# Altium PCB 远程医疗.PcbDoc
Units mm, origin at the board's own origin, x right, y up, seen from the top; angles counter-clockwise.
Board outline 50 x 100 mm, 4 copper layers (Top Layer, Internal Plane 1, Internal Plane 2, Bottom Layer); 81 components, 85 nets, 357 pads, 0 vias.
Unrouted connection lines stored in the file: 236.
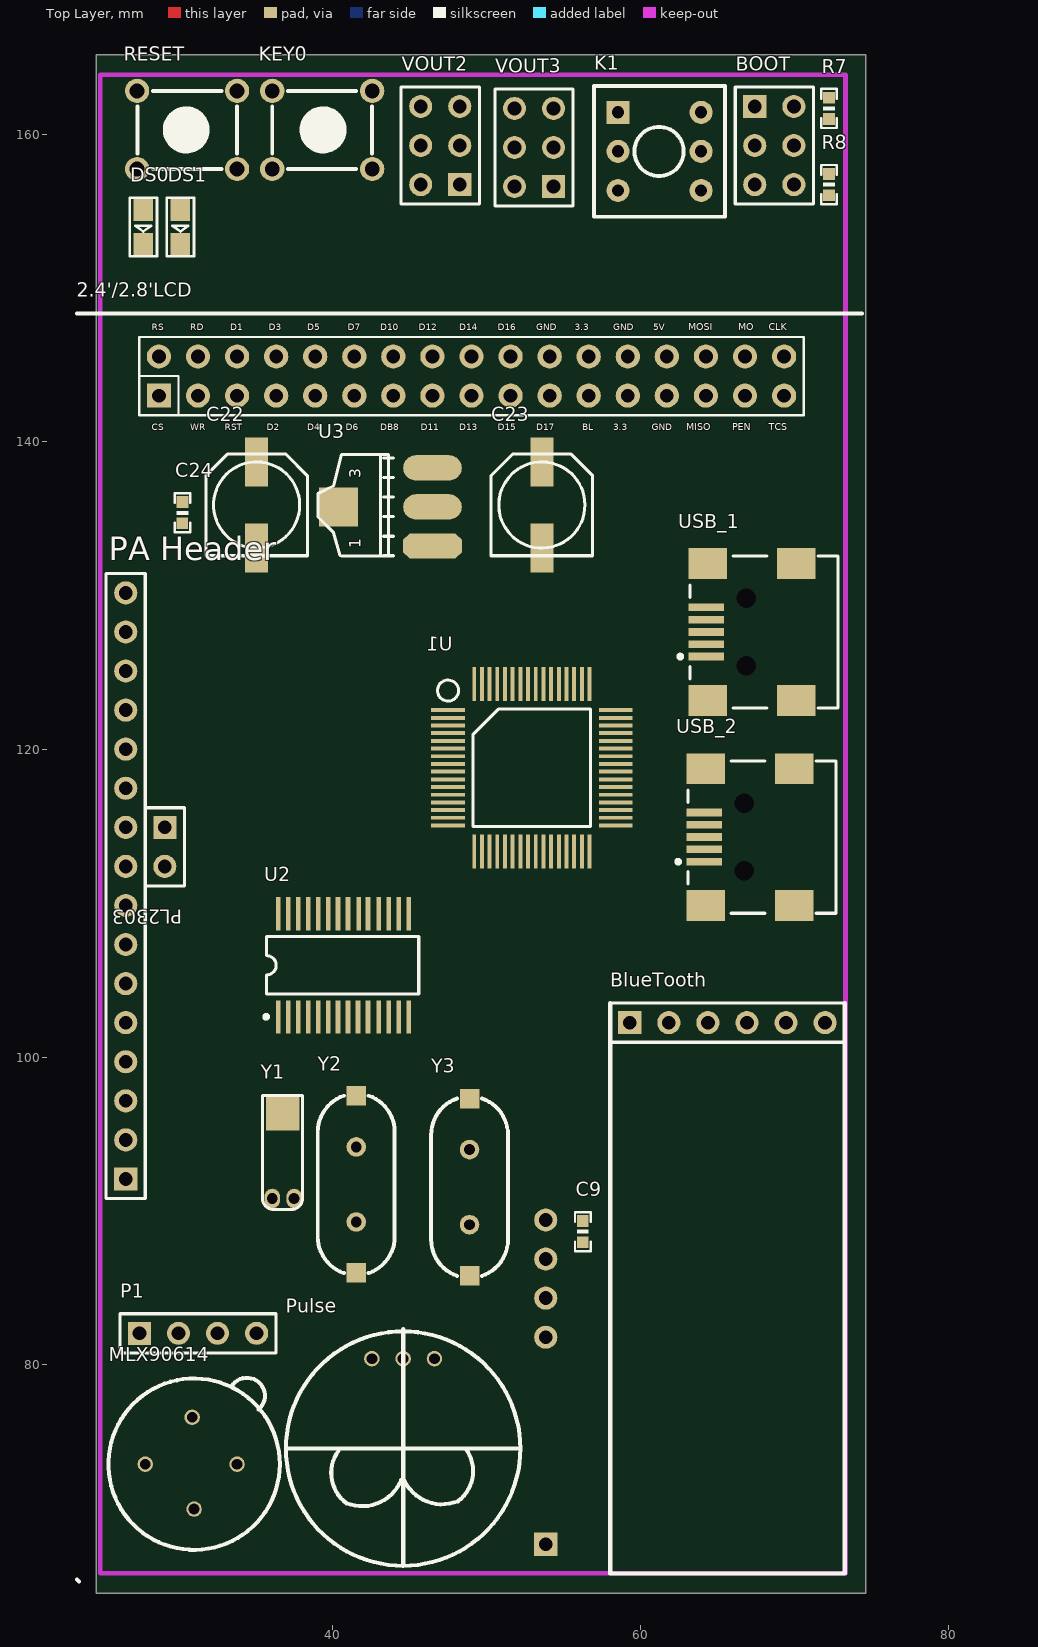
[diagram p0: Top Layer view]
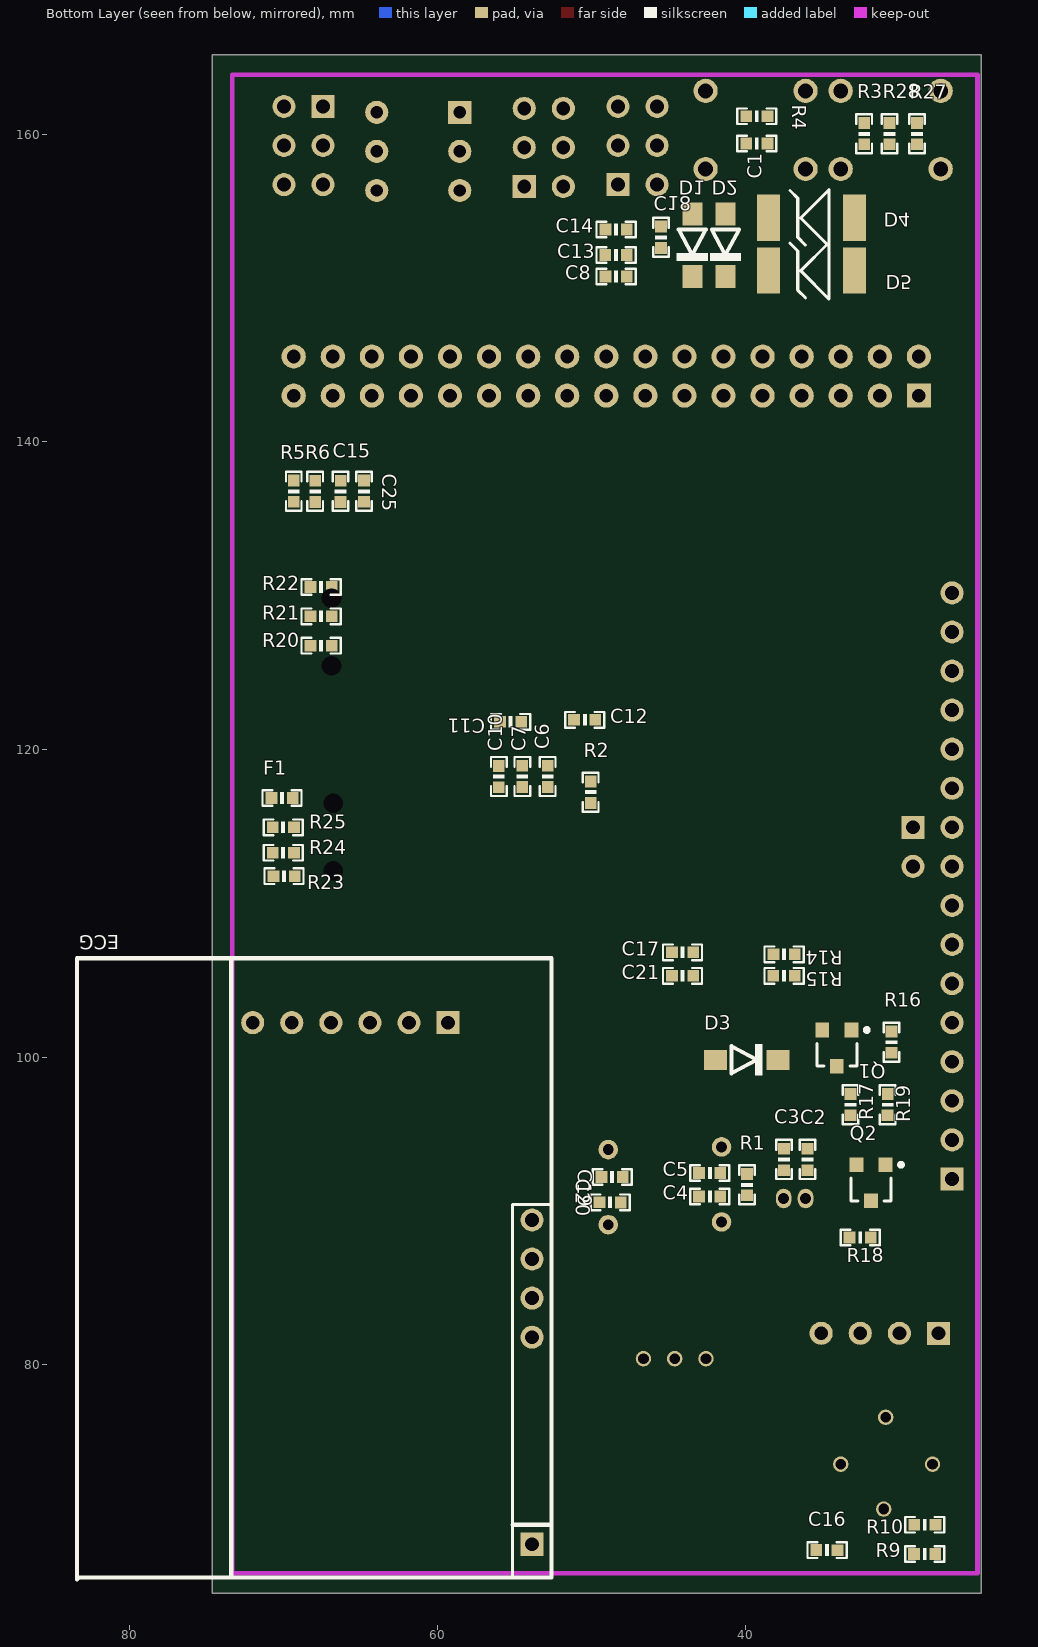
[diagram p1: Bottom Layer view, seen from below]
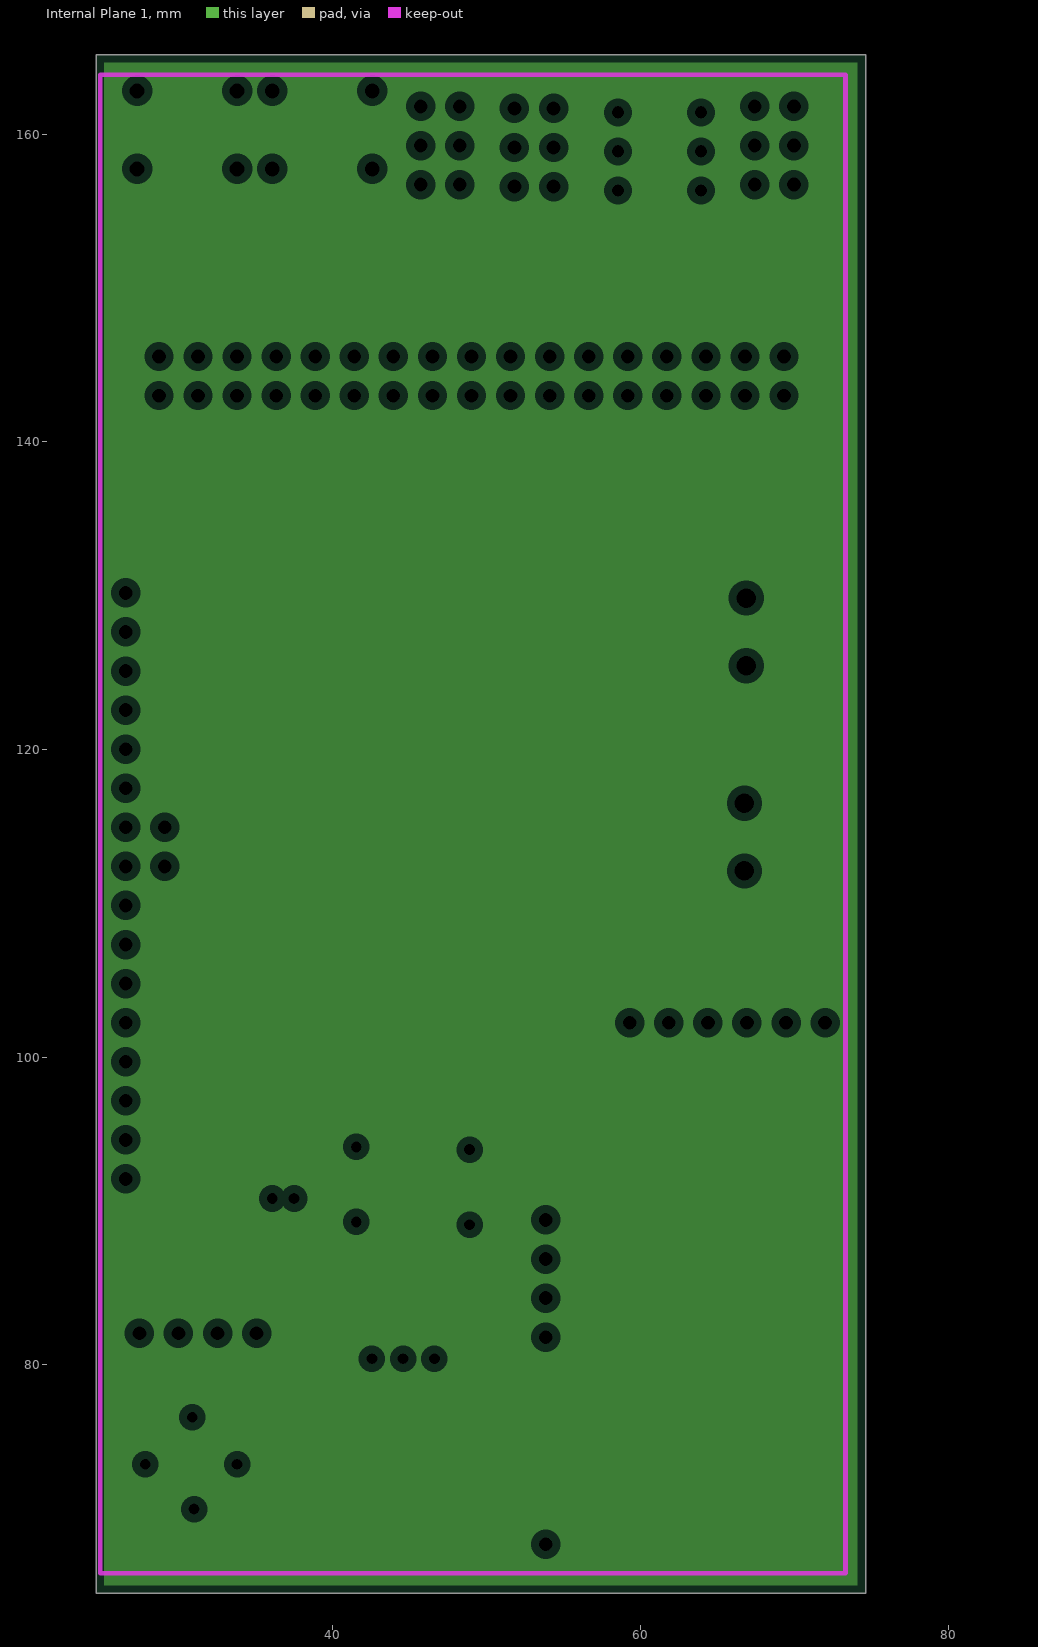
[diagram p2: Internal Plane 1, clearances drawn from the general rule]
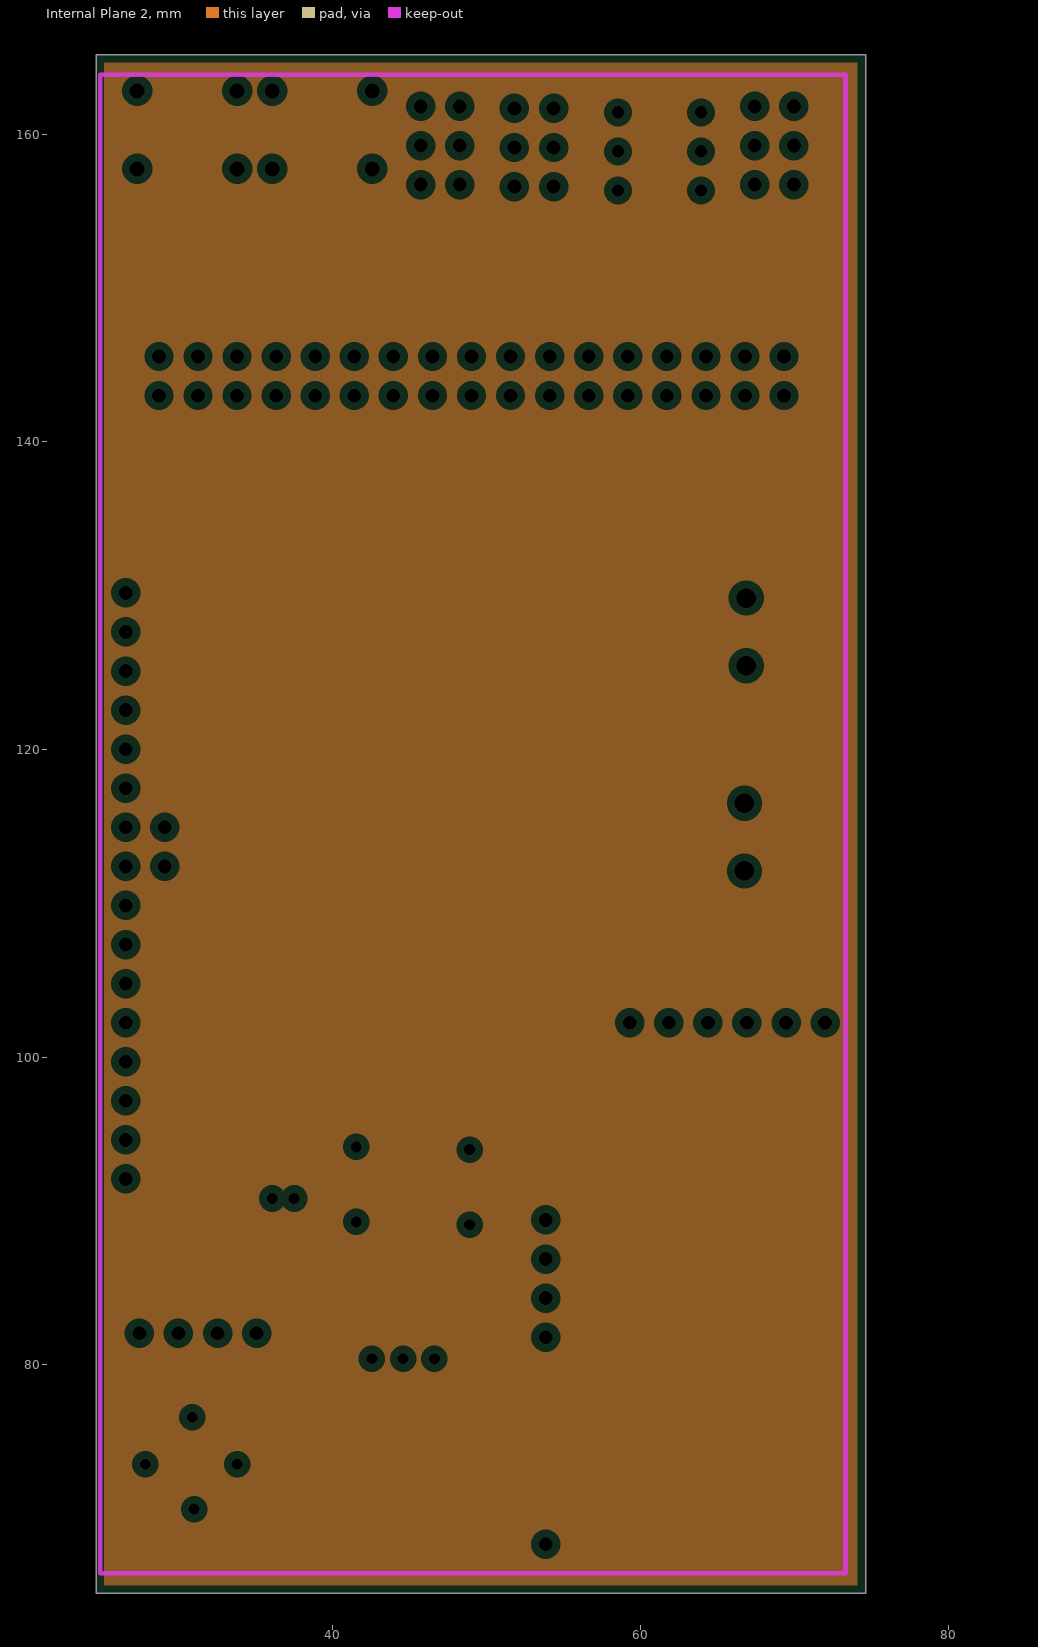
[diagram p3: Internal Plane 2, clearances drawn from the general rule]

## Layer stack, top to bottom
Top Layer: signal copper 0.0356
Dielectric: dielectric 0.32, FR-4, Dk 4.8
Internal Plane 1: plane copper 0.0356
Dielectric: dielectric 0.32, FR-4, Dk 4.8
Internal Plane 2: plane copper 0.0356
Dielectric: dielectric 0.32, FR-4, Dk 4.8
Bottom Layer: signal copper 0.0356

## Board outline
24.638,65.151 74.638,65.151 74.638,165.151 24.638,165.151

## Design rules (kind name [scope] priority, off if disabled: settings)
Clearance [All] p1: gap=0.3
PlaneClearance [All] p1: clearance=0.508
PlaneConnect [All] p1: planeconnectstyle=Relief reliefexpansion=0.508 reliefentries=4 reliefconductorwidth=0.254 reliefairgap=0.254
PolygonConnect [All] p1: connectstyle=Relief reliefconductorwidth=0.254 reliefentries=4 polygonreliefangle="90 Angle" airgapwidth=0.254
RoomDefinition 远程医疗 [InComponentClass('远程医疗')] p1: confinementstyle=ConfineIn formatcopy=TRUE lockcomponents=FALSE outline 0,0 50.8,0 50.8,25.4 0,25.4
RoutingVias [All] p1: holewidth=0.8 width=1.6 viastyle="Through Hole" minholewidth=0.711 minwidth=1.27 maxholewidth=0.711 maxwidth=1.27
SolderMaskExpansion [All] p1: expansion=0.102
Width [All] p1: maxlimit=0.3 minlimit=0.3 preferedwidth=0.3
26 further rules are at their usual default settings.

## Components (designator, comment, footprint, x,y, rotation, side; value= is the part's Value field where it differs from the comment)
2.4'/2.8'LCD "TFT_LCD" DB2*17 54.102,117.602 r0 top
BlueTooth "BlueTooth" BlueTooth 59.309,102.235 r0 top
BOOT "VCC5" HDR2X3 67.437,161.798 r270 top
C1 "104" 0603P#1 39.243,159.385 r180 bottom
C2 "22pF" 0603P#1 35.941,93.345 r270 bottom
C3 "22pF" 0603P#1 37.465,93.345 r270 bottom
C4 "22pF" 0603P#1 42.291,90.932 r0 bottom
C5 "22pF" 0603P#1 42.291,92.456 r0 bottom
C6 "104" 0603P#1 52.832,118.237 r90 bottom
C7 "10u" 0603P#1 54.483,118.237 r90 bottom
C8 "104" 0603P#1 48.387,150.749 r180 bottom
C9 "104" 0603P#1 56.261,88.646 r90 top
C10 "104" 0603P#1 56.007,118.237 r270 bottom
C11 "104" 0603P#1 55.245,121.793 r180 bottom
C12 "104" 0603P#1 50.419,121.92 r0 bottom
C13 "104" 0603P#1 48.387,152.146 r0 bottom
C14 "104" 0603P#1 48.387,153.797 r180 bottom
C15 "22pF" 0603P#1 66.294,136.779 r270 bottom
C16 "100nF" 0603P#1 34.671,67.945 r0 bottom
C17 "104" 0603P#1 44.069,106.807 r180 bottom
C18 "104" 0603P#2 45.466,153.289 r90 bottom
C19 "22" 0603P#1 48.641,92.202 r0 bottom
C20 "22" 0603P#1 48.768,90.551 r0 bottom
C21 "10u" 0603P#1 44.069,105.283 r180 bottom
C22 "220uF" CC6.56.5 35.052,135.89 r270 top
C23 "220uF" CC6.56.5 53.594,135.89 r270 top
C24 "104" 0603P#1 30.226,135.382 r90 top
C25 "104" 0603P#1 64.77,136.779 r90 bottom
D1 "1N4148" DIODE_SOP 43.434,152.781 r270 bottom
D2 "1N4148" DIODE_SOP 41.275,152.781 r270 bottom
D3 "1N4148" DIODE_SOP 39.878,99.822 r180 bottom
D4 "SMBJ5.0A" SMBJ 35.56,154.559 r0 bottom
D5 "SMBJ3.3A" SMBJ 35.56,151.13 r0 bottom
DS0 "LED0" SMDLED 27.688,155.068 r270 top
DS1 "PWR" SMDLED 30.101,155.068 r270 top
ECG "ECG" ECG 53.848,68.326 r90 bottom
F1 "500mA" 0603P#1 70.104,116.84 r180 bottom
K1 "BUTTON" BTN8.5*8.5 58.547,161.417 r0 top
KEY0 "KEY_M" KEY_M 36.068,162.814 r0 top
MLX90614 "MLX90614" MLX90614 30.861,76.581 r90 top
P1 "Header 4" HDR1X4 27.432,82.042 r0 top
"PA Header" "Header 16" HDR1X16 26.543,92.075 r90 top
PL2303 "UART" HDR1X2 29.083,114.935 r270 top
Pulse "Pulse" Pulse 46.609,80.391 r180 top
Q1 "8050" SOT-23R 34.036,100.711 r0 bottom
Q2 "8550" SOT-23R 31.813,91.948 r0 bottom
R1 "1M" 0603P#1 39.878,91.694 r90 bottom
R2 "10R" 0603P#1 50.038,117.221 r270 bottom
R3 "10K" 0603P#1 32.258,160.02 r90 bottom
R4 "0R" 0603P#1 39.243,161.163 r180 bottom
R5 "4.7K" 0603P#1 69.342,136.779 r90 bottom
R6 "10R" 0603P#1 67.945,136.779 r270 bottom
R7 "100K" 0603P#1 72.263,161.671 r90 top
R8 "100K" 0603P#1 72.263,156.718 r270 top
R9 "4.7K" 0603P#1 28.321,67.691 r0 bottom
R10 "4.7K" 0603P#1 28.321,69.596 r180 bottom
R14 "10K" 0603P#1 37.465,106.68 r180 bottom
R15 "10K" 0603P#1 37.465,105.283 r0 bottom
R16 "1K" 0603P#1 30.48,100.965 r90 bottom
R17 "10K" 0603P#1 33.147,96.901 r90 bottom
R18 "1K" 0603P#1 32.512,88.265 r0 bottom
R19 "1K" 0603P#1 30.734,96.901 r90 bottom
R20 "22R" 0603P#1 67.564,126.746 r180 bottom
R21 "22R" 0603P#1 67.564,128.651 r180 bottom
R22 "1.5K" 0603P#1 67.564,130.556 r180 bottom
R23 "22R" 0603P#1 69.977,111.76 r180 bottom
R24 "22R" 0603P#1 70.028,113.284 r180 bottom
R25 "1.5K" 0603P#1 70.028,114.935 r180 bottom
R27 "510" 0603P#1 28.829,160.02 r90 bottom
R28 "510" 0603P#1 30.607,160.02 r90 bottom
RESET "KEY_M" KEY_M 33.782,157.734 r180 top
U1 "STM32F103RCT6" LQFP64 47.498,122.555 r0 top
U2 "PL2303" ssop28 36.449,102.616 r90 top
U3 "AMS1117-3.3" AMS1117 46.482,133.223 r90 top
USB_1 "USB" USB/SM0.8-6H5 72.136,127.635 r0 top
USB_2 "USB" USB/SM0.8-6H5 72.009,114.3 r0 top
VOUT2 "VCC3.3" HDR2X3 48.26,156.718 r90 top
VOUT3 "VCC5" HDR2X3 54.356,156.591 r90 top
Y1 "32.768MHz" "XTAL 32M" 36.068,90.805 r90 top
Y2 "8MHz" XTAL_US 41.529,89.281 r90 top
Y3 "12MHz" XTAL_US 48.895,93.98 r270 top

## Footprints (in the part's own frame and the unit in brackets; to place one, negate y for a bottom-side part, rotate by r counter-clockwise, add the part's x,y. Pads: shape width x height; smd on the part's side, far side on the other; paste and mask are expansions set on the pad)
0603P#1 [mil]
  rect 30x30 smd: 1(-27,0) 2(27.5,-0.06)
  silkscreen extent -50,-20 50,20
0603P#2 [mil]
  rect 30x30 smd: 1(-27,0) 2(27.5,0.06)
  silkscreen extent -50,-20 50,20
AMS1117 [mil]
  oct 65x150 smd: 1(0.03,-0.06)
  oval 65x150 smd: 2(100.03,-0.06) 3(200.03,-0.06)
  rect 100x100 smd: 4(100.03,239.94)
  silkscreen extent -26,100 234,293
BlueTooth [mm]
  rect 1.5x1.5 hole 0.9: 1(0,0)
  round 1.5 hole 0.9: 2(2.54,0) 3(5.08,0) 4(7.62,0) 5(10.16,0) 6(12.7,0)
  silkscreen extent -1.27,-35.81 13.97,1.27
BTN8.5*8.5 [mm]
  rect 1.5x1.5 hole 0.8: 1(0,0)
  round 1.5 hole 0.8: 2(0,-2.54) 3(0,-5.08) 4(5.4,-5.08) 5(5.4,-2.54) 6(5.4,0)
  silkscreen extent -1.55,-6.79 6.95,1.71
CC6.56.5 [mm]
  rect 3.2x1.5 smd: 1(-2.794,0) 2(2.8,0)
  silkscreen extent -3.3,-3.3 3.3,3.3
DB2*17 [mil]
  rect 62x62 hole 35: 1(-1000,1000)
  round 62 hole 35: 2(-1000,1100) 3(-900,1000) 4(-900,1100) 5(-800,1000) 6(-800,1100) 7(-700,1000) 8(-700,1100) 9(-600,1000) 10(-600,1100) 11(-500,1000) 12(-500,1100) 13(-400,1000) 14(-400,1100) 15(-300,1000) 16(-300,1100) 17(-200,1000) 18(-200,1100) 19(-100,1000) 20(-100,1100) 21(0,1000) 22(0,1100) 23(100,1000) 24(100,1100) 25(200,1000) 26(200,1100) 27(300,1000) 28(300,1100) 29(400,1000) 30(400,1100) 31(500,1000) 32(500,1100) 33(600,1000) 34(600,1100)
  round 133.86 on Top Overlay: ""(-1080,-1935) ""(675,-1935)
  silkscreen extent -1210,-2035 800,1210
DIODE_SOP [mm]
  rect 1.5x1.3 smd: 1(-2.032,0) 2(2.032,0)
  silkscreen extent -1.02,-1.02 1.02,1.02
ECG [mm]
  rect 1.5x1.5 hole 0.9: 1(0,0)
  round 1.5 hole 0.9: 2(13.462,0) 3(16.002,0) 4(18.542,0) 5(21.082,0)
  silkscreen extent -2.29,-1.27 38.1,29.59
HDR1X2 [mm] "Connector; Header; 2 Position"
  rect 1.5x1.5 hole 0.9: 1(0,0)
  round 1.5 hole 0.9: 2(2.54,0)
  silkscreen extent -1.27,-1.27 3.81,1.27
HDR1X4 [mm] "Connector; Header; 4 Position"
  rect 1.5x1.5 hole 0.9: 1(0,0)
  round 1.5 hole 0.9: 2(2.54,0) 3(5.08,0) 4(7.62,0)
  silkscreen extent -1.27,-1.27 8.89,1.27
HDR1X16 [mm]
  rect 1.5x1.5 hole 0.9: 1(0,0)
  round 1.5 hole 0.9: 2(2.54,0) 3(5.08,0) 4(7.62,0) 5(10.16,0) 6(12.7,0) 7(15.24,0) 8(17.78,0) 9(20.32,0) 10(22.86,0) 11(25.4,0) 12(27.94,0) 13(30.48,0) 14(33.02,0) 15(35.56,0) 16(38.1,0)
  silkscreen extent -1.27,-1.27 39.37,1.27
HDR2X3 [mm]
  rect 1.5x1.5 hole 0.9: 1(0,0)
  round 1.5 hole 0.9: 2(0,2.54) 3(2.54,0) 4(2.54,2.54) 5(5.08,0) 6(5.08,2.54)
  silkscreen extent -1.27,-1.27 6.35,3.81
KEY_M [mil]
  round 62 hole 38: 1(0,0) 1(255.91,0) 2(0,-200) 2(255.91,-200)
  silkscreen extent 0,-200 255,0
LQFP64 [mm] "LQFP64"
  rect 2.2x0.254 smd: 1(0,0) 2(0,-0.5) 3(0,-1) 4(0,-1.5) 5(0,-2) 6(0,-2.5) 7(0,-3) 8(0,-3.5) 9(0,-4) 10(0,-4.5) 11(0,-5) 12(0,-5.5) 13(0,-6) 14(0,-6.5) 15(0,-7) 16(0,-7.5) 33(10.9,-7.5) 34(10.9,-7) 35(10.9,-6.5) 36(10.9,-6) 37(10.9,-5.5) 38(10.9,-5) 39(10.9,-4.5) 40(10.9,-4) 41(10.9,-3.5) 42(10.9,-3) 43(10.9,-2.5) 44(10.9,-2) 45(10.9,-1.5) 46(10.9,-1) 47(10.9,-0.5) 48(10.9,0)
  rect 0.254x2.2 smd: 17(1.7,-9.2) 18(2.2,-9.2) 19(2.7,-9.2) 20(3.2,-9.2) 21(3.7,-9.2) 22(4.2,-9.2) 23(4.7,-9.2) 24(5.2,-9.2) 25(5.7,-9.2) 26(6.2,-9.2) 27(6.7,-9.2) 28(7.2,-9.2) 29(7.7,-9.2) 30(8.2,-9.2) 31(8.7,-9.2) 32(9.2,-9.2) 49(9.2,1.7) 50(8.7,1.7) 51(8.2,1.7) 52(7.7,1.7) 53(7.2,1.7) 54(6.7,1.7) 55(6.2,1.7) 56(5.7,1.7) 57(5.2,1.7) 58(4.7,1.7) 59(4.2,1.7) 60(3.7,1.7) 61(3.2,1.7) 62(2.7,1.7) 63(2.2,1.7) 64(1.7,1.7)
  silkscreen extent -0.68,-7.56 9.26,1.95
MLX90614 [mm]
  round 1 hole 0.7: 1(0,0) 2(-3.048,3.048) 3(-5.969,-0.127) 4(-3.048,-2.921)
  silkscreen extent -8.62,-5.7 2.56,5.44
Pulse [mm]
  round 1 hole 0.7: 1(0,0) 2(2.032,0) 3(4.064,0)
  silkscreen extent -5.59,-1.9 9.65,13.46
SMBJ [mm]
  rect 1.5x3 smd: 1(-2.667,0) 2(2.921,0)
  silkscreen extent -1.02,-1.83 1.52,1.85
SMDLED [mm]
  rect 1.4x1.27 smd: 1(0.001,-0.002) 2(2.211,-0.002)
  silkscreen extent -0.8,-0.89 3.01,0.89
SOT-23R [mm]
  rect 0.9x0.95 smd: 1(0.95,-1.048) 2(-0.95,-1.048) 3(0,1.302)
  silkscreen extent -2.07,-1.17 1.3,1.3
ssop28 [mm]
  rect 2.15x0.305 smd: 1(0,0) 2(0,-0.65) 3(0,-1.3) 4(0,-1.95) 5(0,-2.6) 6(0,-3.25) 7(0,-3.9) 8(0,-4.55) 9(0,-5.2) 10(0,-5.85) 11(0,-6.552) 12(0,-7.202) 13(0,-7.852) 14(0,-8.502) 15(6.7,-8.502) 16(6.7,-7.852) 17(6.7,-7.202) 18(6.7,-6.552) 19(6.7,-5.85) 20(6.7,-5.252) 21(6.7,-4.55) 22(6.7,-3.9) 23(6.7,-3.25) 24(6.7,-2.6) 25(6.7,-1.95) 26(6.7,-1.3) 27(6.7,-0.65) 28(6.7,0)
  silkscreen extent -0.12,-9.14 5.22,0.9
USB/SM0.8-6H5 [mm]
  rect 2.3x0.5 smd: 1(-7.85,-1.6) 2(-7.85,-0.8) 3(-7.85,0) 4(-7.85,0.8) 5(-7.85,1.6)
  rect 2.5x2 smd: 6(-7.75,4.45) 7(-1.996,4.45) 8(-7.75,-4.45) 9(-1.996,-4.45)
  round 0.6 hole 1.27 unplated: MH1(-5.25,2.2) MH2(-5.25,-2.2)
  silkscreen extent -9.67,-4.95 0.7,4.95
"XTAL 32M" [mil]
  oval 50x40 hole 28: 1(0,0) 2(0,-56)
  rect 92.13x86 smd: ""(220,-27)
  silkscreen extent -28,-77 264,25
XTAL_US [mil]
  round 50 hole 28: 1(0,0) 2(192.13,0)
  rect 50x50 smd: ""(-130.32,0) ""(322.44,0)
  silkscreen extent -131,-98 323,98

## Part data
BOOT VOUT2 VOUT3: library part "Header 3X2", "Header, 3-Pin, Dual row"
C1 C2 C3 C4 C5 C6 C7 C8 C9 C10 C11 C12 C13 C14 C15 C16 C17 C18 C19 C20 C21 C24 C25: library part C
C22 C23: library part CAP
D1 D2 D3: library part D
D4 D5: library part SMBJ, "TVS"
DS0 DS1: library part LED2, "Typical RED, GREEN, YELLOW, AMBER GaAs LED"
F1 R1 R2 R3 R4 R5 R6 R7 R8 R9 R10 R14 R15 R16 R17 R18 R19 R20 R21 R22 R23 R24 R25 R27 R28: library part R
P1: "Header, 4-Pin"
"PA Header": "Header, 16-Pin"
PL2303: library part "Header 2", "Header, 2-Pin"
Q1: library part NPN, "8050/BCW846/BCW847"
Q2: library part PNP, "8550/BCW68"
U1: library part STM32F103RBT6
U3: library part AMS1117
USB_1 USB_2: library part USB5
Y1 Y2 Y3: library part XTAL, "Crystal Oscillator"

## Nets (pads, with @x,y where several pads share a name; then routed paths per layer and width w, separated by ;. In a path a pad name is that pad's centre, name@x,y a point inside that pad or via, vN(x,y) a via of type N, cw(c..) or ccw(c..) an arc to the next point about the centre after c; other vN are vias at no path point)
3V3: C17.2 C21.2 U2.4 U2.17
BOOT0: R7.1 R18.2 U1.60
BOOT1: 2.4'/2.8'LCD.8 R8.2 U1.28
"BT RXD": "PA Header.10" BlueTooth.2 U1.42
"BT TXD": "PA Header.11" BlueTooth.3 U1.43
ECG: "PA Header.3" ECG.1 U1.16
GND: 2.4'/2.8'LCD.22 2.4'/2.8'LCD.26 2.4'/2.8'LCD.27 BlueTooth.4 BOOT.5 BOOT.6 C1.1 C2.1 C3.1 C4.1 C5.1 C6.1 C7.1 C8.2 C9.2 C10.2 C11.2 C12.2 C13.1 C14.1 C15.2 C16.1 C17.1 C18.2 C19.1 C20.1 C21.1 C22.2 C24.1 D4.1 D5.1 DS1.2 ECG.5 KEY0.1 MLX90614.4 P1.4 Pulse.3 R4.1 RESET.2 U1.12 U1.18 U1.31 U1.47 U1.63 U2.7 U2.18 U2.21 U2.25 U2.26 VOUT2.1 VOUT2.3 VOUT2.5 VOUT3.1 VOUT3.3 VOUT3.5
JTCK: "PA Header.15" U1.49
JTDI: "PA Header.16" U1.50
JTDO: 2.4'/2.8'LCD.9 U1.55
JTMS: "PA Header.14" KEY0.2 U1.46
JTRST: 2.4'/2.8'LCD.10 U1.56
"LCD BL": 2.4'/2.8'LCD.23 U1.51
"LCD CS": 2.4'/2.8'LCD.1 U1.40
"LCD D0": 2.4'/2.8'LCD.6 U1.26
"LCD D1": 2.4'/2.8'LCD.7 U1.27
"LCD D5": 2.4'/2.8'LCD.11 U1.57
"LCD D6": 2.4'/2.8'LCD.12 U1.58
"LCD D7": 2.4'/2.8'LCD.13 U1.59
"LCD D8": 2.4'/2.8'LCD.14 U1.61
"LCD D9": 2.4'/2.8'LCD.15 U1.62
"LCD D10": 2.4'/2.8'LCD.16 U1.29
"LCD D11": 2.4'/2.8'LCD.17 U1.30
"LCD D12": 2.4'/2.8'LCD.18 U1.33
"LCD D13": 2.4'/2.8'LCD.19 U1.34
"LCD D14": 2.4'/2.8'LCD.20 U1.35
"LCD D15": 2.4'/2.8'LCD.21 U1.36
"LCD RD": 2.4'/2.8'LCD.4 U1.37
"LCD RS": 2.4'/2.8'LCD.2 U1.39
"LCD WR": 2.4'/2.8'LCD.3 U1.38
LED0: "PA Header.9" DS0.2 U1.41
Net2.4'/2.8'LCD_31: 2.4'/2.8'LCD.31 R6.2
NetBOOT_3: BOOT.3 R7.2
NetBOOT_4: BOOT.4 R8.1
NetC2_2: C2.2 U1.3 Y1.1
NetC3_2: C3.2 U1.4 Y1.2
NetC4_2: C4.2 R1.1 U1.5 Y2.1
NetC5_2: C5.2 R1.2 U1.6 Y2.2
NetC6_2: C6.2 C7.2 R2.2 U1.13
NetC15_1: C15.1 R5.2 R6.1
NetC19_2: C19.2 U2.27 Y3.1
NetC20_2: C20.2 U2.28 Y3.2
NetC23_2: C23.2 C25.1 F1.1 U3.1
NetD1_2: D1.2 D2.2 U1.1
NetD2_1: D2.1 R4.2
NetD3_2: D3.2 Q1.3 R14.2
NetDS0_1: DS0.1 R27.1
NetDS1_1: DS1.1 R28.1
NetF1_2: F1.2 USB_1.5 USB_2.5
NetK1_3: K1.3 K1.4 USB_1.1 USB_2.1
NetQ1_1: Q1.1 R17.1 R19.1 U2.3
NetQ1_2: Q1.2 R16.2
NetQ2_2: Q2.2 R19.2
NetQ2_3: Q2.3 R18.1
NetR15_1: R15.1 R16.1 U2.2
NetR20_2: R20.2 USB_1.2
NetR21_2: R21.2 R22.2 USB_1.3
NetR23_2: R23.2 USB_2.2
NetR24_2: R24.2 R25.2 USB_2.3
PA0: "PA Header.1" Pulse.1 U1.14
PA1: "PA Header.2" U1.15
PA3: "PA Header.4" U1.17
PA4: "PA Header.5" U1.20
PA5: "PA Header.6" U1.21
PA6: "PA Header.7" U1.22
PA7: "PA Header.8" U1.23
PA11: "PA Header.12" R20.1 U1.44
PA12: "PA Header.13" R21.1 U1.45
PC0: 2.4'/2.8'LCD.34 U1.8
PC1: R5.1 U1.9
PC2: 2.4'/2.8'LCD.29 U1.10
PC3: 2.4'/2.8'LCD.30 U1.11
PC4: MLX90614.2 P1.2 R9.1 U1.24
PC5: MLX90614.1 P1.3 R10.1 U1.25
PC11: U1.52
PC12: U1.53
PC13: 2.4'/2.8'LCD.33 U1.2
"PL2303 D+": R24.1 U2.15
"PL2303 D-": R23.1 U2.16
RESET: 2.4'/2.8'LCD.5 C1.2 D3.1 R3.1 RESET.1 U1.7
RXD: PL2303.2 U2.5
TXD: PL2303.1 U2.1
VCC: BlueTooth.5
VCC3.3: 2.4'/2.8'LCD.24 2.4'/2.8'LCD.25 BOOT.1 BOOT.2 C8.1 C9.1 C10.1 C11.1 C12.1 C13.2 C16.2 C22.1 C24.2 D1.1 D4.2 ECG.2 MLX90614.3 P1.1 Pulse.2 Q2.1 R2.1 R3.2 R9.2 R10.2 R14.1 R15.2 R17.2 R22.1 R25.1 R27.2 R28.2 U1.19 U1.32 U1.48 U1.64 U3.2 U3.4 VOUT2.2 VOUT2.4 VOUT2.6
VCC5: 2.4'/2.8'LCD.28 C14.2 C18.1 C23.1 C25.2 D5.2 K1.2 K1.5 U2.8 U2.19 U2.20 U2.22 U2.23 U2.24 U3.3 VOUT3.2 VOUT3.4 VOUT3.6
pads on no net: 2.4'/2.8'LCD. 2.4'/2.8'LCD.32 BlueTooth.1 BlueTooth.6 ECG.3 ECG.4 K1.1 K1.6 U1.54 U2.6 U2.9 U2.10 U2.11 U2.12 U2.13 U2.14 USB_1.4 USB_1.6 USB_1.7 USB_1.8 USB_1.9 USB_1.MH1 USB_1.MH2 USB_2.4 USB_2.6 USB_2.7 USB_2.8 USB_2.9 USB_2.MH1 USB_2.MH2 Y1. Y2. Y3.

## Polygon pours and split planes (outlines as drawn)
no net on Internal Plane 1 (split plane): 74.128,65.661 25.148,65.661 25.148,164.641 74.128,164.641
no net on Internal Plane 2 (split plane): 74.128,65.661 25.148,65.661 25.148,164.641 74.128,164.641

## Keep-outs
Keep-Out Layer:
  lines w0.3: 24.892,66.451 73.338,66.451 73.338,163.851 24.892,163.851 24.892,66.451

## Dimensions
24.892,66.451 to 73.338,66.451 on Mechanical 1

## Text inside footprints (layer, text, board x,y; h text height)
2.4'/2.8'LCD: Top Overlay "D16" at 50.727,147.102 h0.71; Top Overlay "DB8" at 43.102,140.602 h0.71; Top Overlay "RS" at 28.227,147.102 h0.71; Top Overlay "CS" at 28.227,140.602 h0.71; Top Overlay "WR" at 30.727,140.602 h0.71; Top Overlay "RST" at 32.977,140.602 h0.71; Top Overlay "D2" at 35.727,140.602 h0.71; Top Overlay "D3" at 35.852,147.102 h0.71; Top Overlay "D4" at 38.352,140.602 h0.71; Top Overlay "D5" at 38.352,147.102 h0.71; Top Overlay "D6" at 40.852,140.602 h0.71; Top Overlay "D7" at 40.977,147.102 h0.71; Top Overlay "D10" at 43.102,147.102 h0.71; Top Overlay "D11" at 45.727,140.602 h0.71; Top Overlay "D15" at 50.727,140.602 h0.71; Top Overlay "D14" at 48.227,147.102 h0.71; Top Overlay "D17" at 53.227,140.602 h0.71; Top Overlay "5V" at 60.852,147.102 h0.71; Top Overlay "GND" at 58.227,147.102 h0.71; Top Overlay "3.3" at 55.727,147.102 h0.71; Top Overlay "D12" at 45.602,147.102 h0.71; Top Overlay "D1" at 33.352,147.102 h0.71; Top Overlay "RD" at 30.727,147.102 h0.71; Top Overlay "GND" at 53.227,147.102 h0.71; Top Overlay "GND" at 60.727,140.602 h0.71; Top Overlay "D13" at 48.227,140.602 h0.71; Top Overlay "PEN" at 65.977,140.602 h0.76; Top Overlay "CLK" at 68.352,147.102 h0.76; Top Overlay "MOSI" at 63.102,147.102 h0.76; Top Overlay "MO" at 66.352,147.102 h0.76; Top Overlay "TCS" at 68.352,140.602 h0.76; Top Overlay "MISO" at 62.977,140.602 h0.76; Top Overlay "BL" at 56.227,140.602 h0.71; Top Overlay "3.3" at 58.227,140.602 h0.71
U3: Top Overlay "3" at 42.089,137.643 h1.27 r90; Top Overlay "1" at 42.089,133.071 h1.27 r90